# Altium PCB POETIC_Backplane_V2.PcbDoc (part 1 of 2)
Units mm, origin at the board's own origin, x right, y up, seen from the top; angles counter-clockwise.
Board outline 400 x 128 mm, 4 copper layers (Top Layer, Signal Layer 1, Internal Plane 1, Bottom Layer), stack 1.49 mm thick; 36 components, 76 nets, 998 pads, 2 vias.
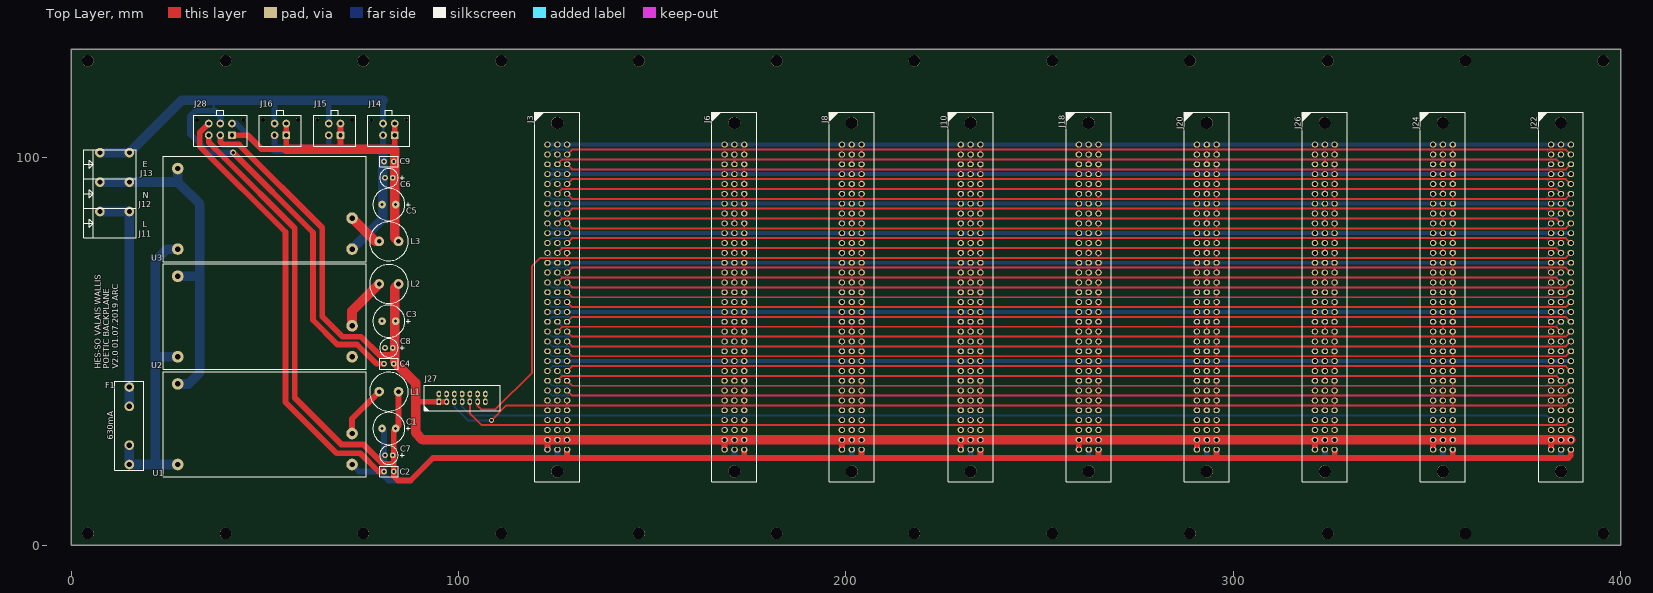
[diagram p0: Top Layer view]
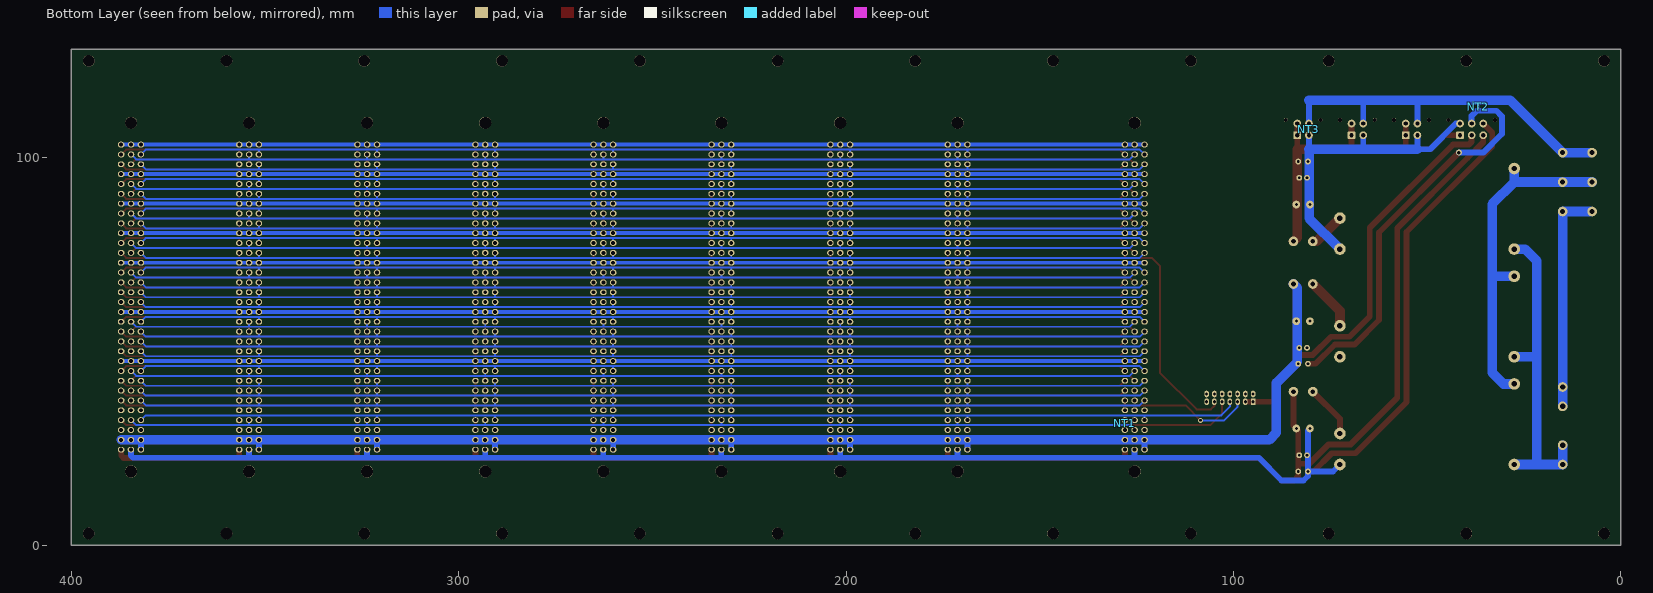
[diagram p1: Bottom Layer view, seen from below]
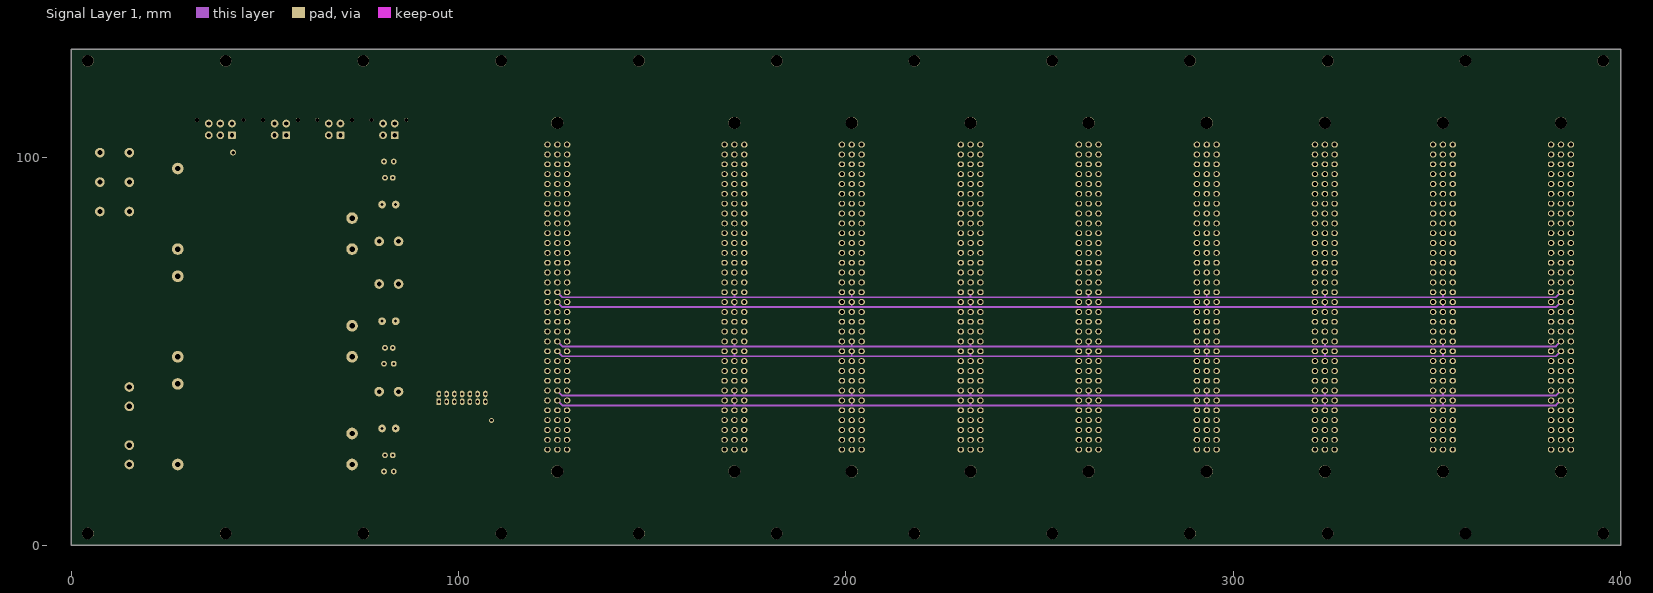
[diagram p2: Signal Layer 1]
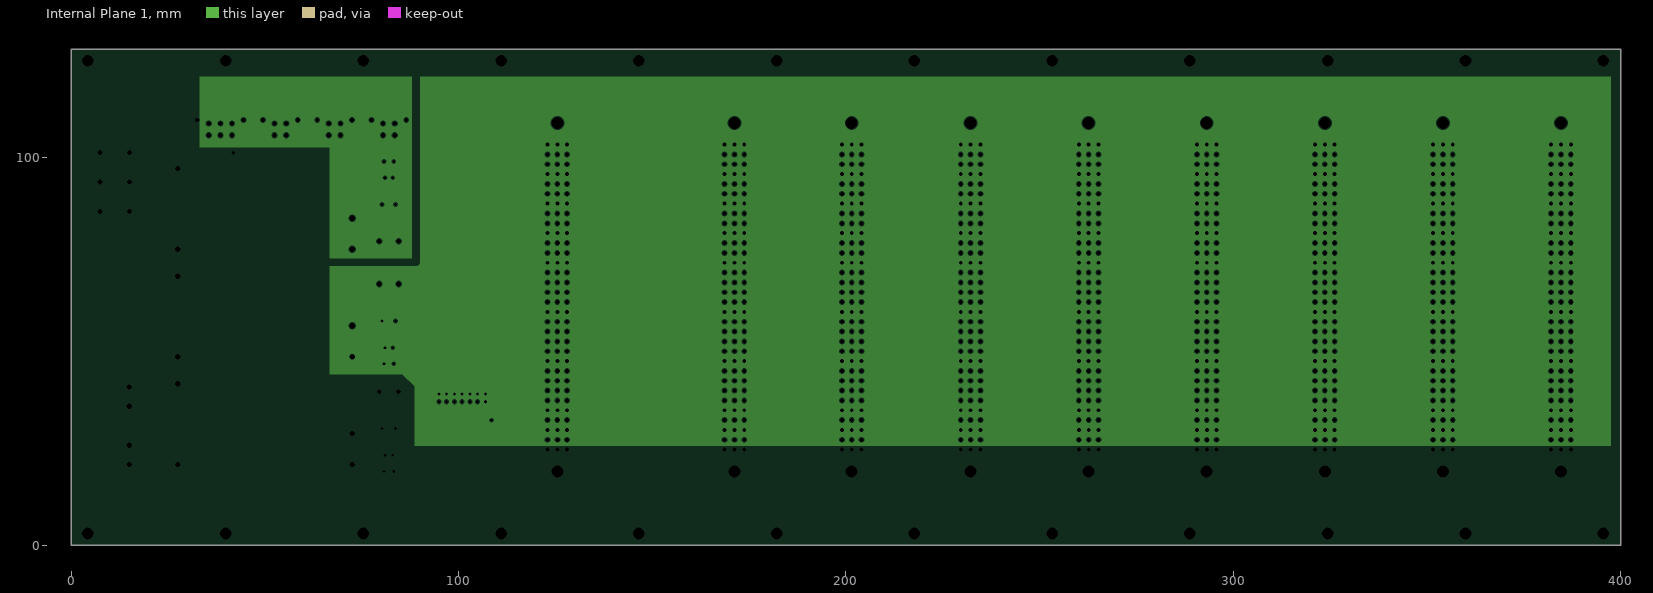
[diagram p3: Internal Plane 1, clearances drawn from the general rule]

## Layer stack, top to bottom
Top Layer: signal copper 0.035
Dielectric 1: core 0.45, FR-4, Dk 4.2
Signal Layer 1: signal copper 0.035
Dielectric 3: prepreg 0.45, FR-4, Dk 4.2
Internal Plane 1: plane copper 0.035, net (Multiple Nets)
Dielectric 2: core 0.45, FR-4, Dk 4.2
Bottom Layer: signal copper 0.035

## Board outline
0,0 400,0 400,128 0,128

## Design rules (kind name [scope] priority, off if disabled: settings)
AcuteAngle [All] p1: minimum=9.00000000000000E+0001 checktracksonly=TRUE
AssemblyTestPointUsage [All] p1 off:
AssemblyTestpoint [All] p1 off: testpointundercomponent=TRUE minsize=1.016 maxsize=2.54 preferedsize=1.524 minholesize=0 maxholesize=1.016 preferedholesize=0.813 testpointgrid=0.025 usegrid=TRUE gridtolerance=0 allowsidetop=TRUE allowsidebottom=TRUE
BoardOutlineClearance [All] p1 off: gap=0.25 ignorepadtopadclearanceinfootprint=FALSE
Clearance [All] p1: gap=0.25 ignorepadtopadclearanceinfootprint=FALSE except(0: Arc-Hole Track-Hole SMDPad-Hole THPad-Hole Via-Hole Fill-Hole Poly-Hole Region-Hole Text-Hole)
ComponentClearance [All] p1 off: gap=0.25 collisioncheckmode=3 verticalgap=0.25 showdistances=FALSE
DiffPairsRouting [All] p1 off: maxlimit=0.254 minlimit=0.254 mostfreqgap=0.254 toplayer_minwidth=0.381 toplayer_maxwidth=0.381 toplayer_prefwidth=0.381 midlayer1_minwidth=0.381 midlayer1_maxwidth=0.381 midlayer1_prefwidth=0.381 bottomlayer_minwidth=0.381 bottomlayer_maxwidth=0.381 bottomlayer_prefwidth=0.381 maxuncoupledlength=12.7
FabricationTestPointUsage [All] p1 off: valid=0 allowmultiple=FALSE
FabricationTestpoint [All] p1 off: side=3 testpointundercomponent=TRUE minsize=1.016 maxsize=2.54 preferedsize=1.524 minholesize=0 maxholesize=1.016 preferedholesize=0.813 testpointgrid=0.025 allowsidetop=TRUE allowsidebottom=TRUE usegrid=TRUE gridtolerance=0
FanoutControl Fanout_BGA [IsBGA] p1 off: bgadir=Out bgaviamode=Centered fanoutstyle=Auto fanoutdirection=Alternating viagrid=0.025 // Fanout_BGA (Default Rule)
FanoutControl Fanout_LCC [IsLCC] p2 off: bgadir=Out bgaviamode=Centered fanoutstyle=Auto fanoutdirection=Alternating viagrid=0.025 // Fanout_LCC (Default Rule)
FanoutControl Fanout_SOIC [IsSOIC] p3 off: bgadir=Out bgaviamode=Centered fanoutstyle=Auto fanoutdirection=Alternating viagrid=0.025 // Fanout_SOIC (Default Rule)
FanoutControl Fanout_Small [(CompPinCount < 5)] p4 off: bgadir=Out bgaviamode=Centered fanoutstyle=Auto fanoutdirection=OutThenIn viagrid=0.025 // Fanout_Small (Default Rule)
FanoutControl Fanout_Default [All] p5 off: bgadir=Out bgaviamode=Centered fanoutstyle=Auto fanoutdirection=Alternating viagrid=0.025 // Fanout_Default (Default Rule)
Height [All] p1 off: minheight=0 maxheight=25.4 prefheight=12.7
HoleSize [All] p1 off: absolutevalues=TRUE maxlimit=3 minlimit=0.15 maxpercent=80.000 minpercent=20.000
HoleToHoleClearance [All] p1 off: gap=0.25 allowstackedmicrovias=TRUE
LayerPairs [All] p1 off: enforce=TRUE
MinimumAnnularRing [All] p1 off: minimumring=0.35
MinimumSolderMaskSliver [All] p1 off: minsoldermaskwidth=0
PasteMaskExpansion [All] p1 off: expansion=0
PlaneClearance [All] p1: clearance=0.25
PlaneConnect [All] p1: planeconnectstyle=Relief reliefexpansion=0.5 reliefentries=4 reliefconductorwidth=0.5 reliefairgap=0.5
PolygonConnect [All] p1 off: connectstyle=Relief reliefconductorwidth=0.25 reliefentries=4 polygonreliefangle="90 Angle" airgapwidth=0.25
RoutingCorners [All] p1 off: cornerstyle=45-Degree minsetback=2.5 maxsetback=2.5
RoutingLayers [All] p1 off: top layer_v5=TRUE mid layer 1_v5=TRUE bottom layer_v5=TRUE
RoutingPriority [All] p1 off: routingpriority=0
RoutingTopology [All] p1 off: topology=Shortest
RoutingVias [All] p1: holewidth=0.9 width=1.5 viastyle="Through Hole" minholewidth=0.9 minwidth=1.5 maxholewidth=0.9 maxwidth=1.5
SilkToBoardRegionClearance [All] p1 off:
SilkToSilkClearance [All] p1 off: silktosilkclearance=0
SilkToSolderMaskClearance [IsPad] p1 off: minsilkscreentomaskgap=0 clearancetoexposedcopper=TRUE
SolderMaskExpansion [All] p1 off: expansion=0
Width [All] p1: maxlimit=10 minlimit=0.2 preferedwidth=1
4 further rules are at their usual default settings.

## Classes and differential pairs
component class Connector_1: J3 J6 J8 J10 J18
component class Supply: C1 C2 C3 C4 C5 C6 C7 C8 C9 F1 J11 J12 J13 J14 J15 J16 J28 L1 L2 L3 NT2 NT3 U1 U2 U3
component class Connector_3: J20 J22 J24 J26 J27 NT1

## Components (designator, comment, footprint, x,y, rotation, side; value= is the part's Value field where it differs from the comment)
C1 "100u / 50V" "Capacitor POL P3.5 D8.0 H13.0" 82,30.1 r180 top
C2 "100n / 35v" "Capacitor P2.5 C4.5x2.5 H4.0" 82,19 r0 top value="100n / 35V"
C3 "100u / 50V" "Capacitor POL P3.5 D8.0 H13.0" 82,57.8 r180 top
C4 "100n / 35v" "Capacitor P2.5 C4.5x2.5 H4.0" 82,46.8 r0 top value="100n / 35V"
C5 "100u / 50V" "Capacitor POL P3.5 D8.0 H13.0" 82,87.9 r180 top
C6 "100n / 35v" "Capacitor P2.5 C4.5x2.5 H4.0" 82,99 r0 top value="100n / 35V"
C7 "22u / 50V" "Capacitor POL P2.00 D5.5 H12.0" 82,23.2 r180 top
C8 "22u / 50V" "Capacitor POL P2.00 D5.5 H12.0" 82,50.9 r180 top
C9 "22u / 50V" "Capacitor POL P2.00 D5.5 H12.0" 82,94.8 r180 top
F1 "1A" "Fuse Cartridge 5x20 Shurter" 15,30.8 r270 top
J3 "09032967824" "DIN41612 FEM 3x32 ABC Straight" 125.48,64 r90 top
J6 "09032967824" "DIN41612 FEM 3x32 ABC Straight" 171.2,64 r90 top
J8 "09032967824" "DIN41612 FEM 3x32 ABC Straight" 201.48,64 r90 top
J10 "09032967824" "DIN41612 FEM 3x32 ABC Straight" 232.16,64 r90 top
J11 "1790351" "PC FFKDSA/H1-7,62 - 1790351" 10,83.1 r270 top
J12 "1790351" "PC FFKDSA/H1-7,62 - 1790351" 10,90.7 r270 top
J13 "1790351" "PC FFKDSA/H1-7,62 - 1790351" 10,98.3 r270 top
J14 "43045-0412" "MOLEX 43045-0412" 82,107.3 r0 top
J15 "43045-0412" "MOLEX 43045-0412" 68,107.3 r0 top
J16 "43045-0412" "MOLEX 43045-0412" 54,107.3 r0 top
J18 "09032967824" "DIN41612 FEM 3x32 ABC Straight" 262.64,64 r90 top
J20 "09032967824" "DIN41612 FEM 3x32 ABC Straight" 293.12,64 r90 top
J22 "09032967824" "DIN41612 FEM 3x32 ABC Straight" 384.56,64 r90 top
J24 "09032967824" "DIN41612 FEM 3x32 ABC Straight" 354.08,64 r90 top
J26 "09032967824" "DIN41612 FEM 3x32 ABC Straight" 323.6,64 r90 top
J27 "98414-G06-14ULF" "FlatCable2x7 2MM Straight TH FCI 98414-G06-14ULF" 100.9,38 r0 top
J28 "43045-0612" "MOLEX 43045-0612" 38.5,107.3 r0 top
L1 "2u2, 6A, R=10m" "L P5.0 D10.0 H13.0" 82,39.6 r0 top value="2u2, 6A, R=10m"
L2 "2u2, 6A, R=10m" "L P5.0 D10.0 H13.0" 82,67.4 r0 top value="2u2, 6A, R=10m"
L3 "2u2, 6A, R=10m" "L P5.0 D10.0 H13.0" 82,78.4 r0 top value="2u2, 6A, R=10m"
NT1 "Net Tie" "NET TIE 1005" 128.02,31.4 r90 bottom net-tie
NT2 "Net Tie" "NET TIE 1005" 36.8,113.2 r90 bottom net-tie
NT3 "Net Tie" "NET TIE 1005" 80.5,107.3 r90 bottom net-tie
U1 "IRM20-24" "MEAN WELL IRM-20 Series" 50,31.2 r0 top
U2 "IRM20-3.3" "MEAN WELL IRM-20 Series" 50,59 r0 top
U3 "IRM20-5" "MEAN WELL IRM-20 Series" 50,86.8 r0 top

## Footprints (in the part's own frame and the unit in brackets; to place one, negate y for a bottom-side part, rotate by r counter-clockwise, add the part's x,y. Pads: shape width x height; smd on the part's side, far side on the other; paste and mask are expansions set on the pad)
"Capacitor P2.5 C4.5x2.5 H4.0" [mm] "Capacitor Ceramic"
  round 1.5 hole 0.7: 1(-1.25,0) 2(1.25,0)
  silkscreen extent -2.4,-1.4 2.4,1.4, body extent -2.25,-1.25 2.25,1.25, height 4
"Capacitor POL P2.00 D5.5 H12.0" [mm] "Capacitor Electrolyte Polarized Pitch 2mm, Diameter 5.5mm, Height 12mm"
  round 1.5 hole 0.7: 1(-1,0) 2(1,0)
  silkscreen extent -4,-2.4 2.4,2.4, body extent -2.28,-2.25 2.29,2.25, height 12.05
"Capacitor POL P3.5 D8.0 H13.0" [mm] "Capacitor Electrolyte Polarized Pitch 3.5mm, Diameter 8mm, Height 13mm"
  round 2 hole 0.8: 1(-1.75,0) 2(1.75,0)
  silkscreen extent -5.5,-4.15 4.15,4.15, body extent -4,-4 4.05,4, height 13.05
"DIN41612 FEM 3x32 ABC Straight" [mm] "DIN41612 FEM 3x32 ABC Straight Harting 09 03 296 6824"
  round 3.1 hole 3.1 unplated paste-25.4 mask-25.4: 0(-45,0) 0(45,0)
  oval 1.5x1.7 hole 1: A1(39.37,2.54) A2(36.83,2.54) A3(34.29,2.54) A4(31.75,2.54) A5(29.21,2.54) A6(26.67,2.54) A7(24.13,2.54) A8(21.59,2.54) A9(19.05,2.54) A10(16.51,2.54) A11(13.97,2.54) A12(11.43,2.54) A13(8.89,2.54) A14(6.35,2.54) A15(3.81,2.54) A16(1.27,2.54) A17(-1.27,2.54) A18(-3.81,2.54) A19(-6.35,2.54) A20(-8.89,2.54) A21(-11.43,2.54) A22(-13.97,2.54) A23(-16.51,2.54) A24(-19.05,2.54) A25(-21.59,2.54) A26(-24.13,2.54) A27(-26.67,2.54) A28(-29.21,2.54) A29(-31.75,2.54) A30(-34.29,2.54) A31(-36.83,2.54) A32(-39.37,2.54) B1(39.37,0) B2(36.83,0) B3(34.29,0) B4(31.75,0) B5(29.21,0) B6(26.67,0) B7(24.13,0) B8(21.59,0) B9(19.05,0) B10(16.51,0) B11(13.97,0) B12(11.43,0) B13(8.89,0) B14(6.35,0) B15(3.81,0) B16(1.27,0) B17(-1.27,0) B18(-3.81,0) B19(-6.35,0) B20(-8.89,0) B21(-11.43,0) B22(-13.97,0) B23(-16.51,0) B24(-19.05,0) B25(-21.59,0) B26(-24.13,0) B27(-26.67,0) B28(-29.21,0) B29(-31.75,0) B30(-34.29,-0.02) B31(-36.83,-0.02) B32(-39.37,-0.02) C1(39.37,-2.54) C2(36.83,-2.54) C3(34.29,-2.54) C4(31.75,-2.54) C5(29.21,-2.54) C6(26.67,-2.54) C7(24.13,-2.54) C8(21.59,-2.54) C9(19.05,-2.54) C10(16.51,-2.54) C11(13.97,-2.54) C12(11.43,-2.54) C13(8.89,-2.54) C14(6.35,-2.54) C15(3.81,-2.54) C16(1.27,-2.54) C17(-1.27,-2.54) C18(-3.81,-2.54) C19(-6.35,-2.54) C20(-8.89,-2.54) C21(-11.43,-2.54) C22(-13.97,-2.54) C23(-16.51,-2.54) C24(-19.05,-2.54) C25(-21.59,-2.54) C26(-24.13,-2.54) C27(-26.67,-2.54) C28(-29.21,-2.54) C29(-31.75,-2.54) C30(-34.29,-2.54) C31(-36.83,-2.54) C32(-39.37,-2.54)
  silkscreen extent -47.7,-5.8 47.7,5.8, body extent -47.5,-5.6 47.5,5.6, height 11.6
"FlatCable2x7 2MM Straight TH FCI 98414-G06-14ULF" [mm] "FlatCable2x7 2MM Straight TH FCI 98414-G06-14ULF"
  rrect25% 1.2x1.7 hole 0.8: 1(-6,-1)
  oval 1.2x1.7 hole 0.8: 2(-6,1) 3(-4,-1) 4(-4,1) 5(-2,-1) 6(-2,1) 7(0,-1) 8(0,1) 9(2,-1) 10(2,1) 11(4,-1) 12(4,1) 13(6,-1) 14(6,1)
  silkscreen extent -9.8,-3.3 9.8,3.3, body extent -8,-3 8,3, height 5.9
"Fuse Cartridge 5x20 Shurter" [mm] "Fuse Cartridge 5x20 Shurter"
  round 2.5 hole 1.4: 1(-10,0) 1(-5,0) 2(5,0) 2(10,0)
  silkscreen extent -11.5,-3.7 11.5,3.7, body extent -11,-3.5 11,3.5, height 9
"L P5.0 D10.0 H13.0" [mm] "Inductor P5.0 D10.0 H13.0"
  round 2.5 hole 1.2: 1(-2.5,0) 2(2.5,0)
  silkscreen extent -5,-5 5,5, body extent -5,-5 5,5, height 13
"MEAN WELL IRM-20 Series" [mm] "AC-DC Mean Well C27.2x52.4 H24"
  round 3 hole 1.4: 1(-22.5,-10.4) 2(-22.5,10.4) 3(22.5,-2.4) 4(22.5,-10.4)
  silkscreen extent -26.2,-13.6 26.2,13.6, body extent -26.2,-13.6 26.2,13.6, height 24
"MOLEX 43045-0412" [mm] "Micro-Fit 3.0 Vertical Header, 3.00mm Pitch, Dual Row, 4 Circuits"
  round 1 hole 1 paste-25.4 mask-25.4: 0(-4.5,2.45) 0(4.5,2.45)
  rrect25% 2x2 hole 1.1: 1(1.5,-1.5)
  round 2 hole 1.1: 2(-1.5,-1.5) 3(1.5,1.5) 4(-1.5,1.5)
  silkscreen extent -5.4,-4.3 5.4,5, body extent -5.1,-4 5.1,4.8, height 10
"MOLEX 43045-0612" [mm] "Micro-Fit 3.0 Vertical Header, 3.00mm Pitch, Dual Row, 6 Circuits"
  round 1 hole 1 paste-25.4 mask-25.4: 0(-6,2.45) 0(6,2.45)
  rrect25% 2x2.032 hole 1.1: 1(3,-1.5)
  round 2 hole 1.1: 2(0,-1.5) 3(-3,-1.5) 4(3,1.5) 5(0,1.5) 6(-3,1.5)
  silkscreen extent -6.9,-4.3 6.9,5, body extent -6.6,-4 6.6,4.8, height 10
"NET TIE 1005" [mm] "Net Tie, connect two different net without DRC error"
  rrect25% 0.4x0.5 smd paste-0.8 mask+1: 1(-0.3,0)
  rrect25% 0.4x0.5 smd paste-0.8 mask+0: 2(0.3,0)
  Top Layer region: -0.3,0.25 -0.3,-0.25 0.325,-0.25 0.325,0.25
"PC FFKDSA/H1-7,62 - 1790351" [mm] "Phoenix Contact PCB terminal block - FFKDSA/H1-7,62 - 1790351"
  round 2.5 hole 1.3: 1(-3,-2.6) 2(-3,5)
  silkscreen extent -3.8,-6.8 3.8,6.8, body extent -3.8,-6.8 3.8,6.8, height 21.5

## Part data
C1 C3 C5 C7 C8 C9: library part "Capacitor Polarized", "Capacitor polarized", Manufacturer=Panasonic
  C1 C3 C5: Mouser No.=667-EEU-FR1H101
  C7 C8 C9: Mouser No.=667-EEU-FR1H220
C2 C4 C6: library part Capacitor, "Capacitor"
F1: library part "Fuse Cartridge 5x20", "Fuse Cartridge 5x20"
J3 J6 J8 J10 J18 J20 J22 J24 J26: library part "DIN41612 FEM 3X32 STRAIGHT", "DIN41612 FEM 3X32 ABC STRAIGHT", Manufacturer=Harting, Mouser No.=617-09032967824
J11 J12 J13: library part "PC FFKDSA/H1-7,62 - 1790351", "Phoenix Contact PCB terminal block - FFKDSA/H1-7,62 - 1790351"
J14 J15 J16: library part "MOLEX 43045-0412", "Micro-Fit 3.0 Vertical Header, 3.00mm Pitch, Dual Row, 4 Circuits", Manufacturer=Molex, Mouser No.=538-43045-0412
J27: library part FlatCable2x7, "FlatCable2x7", Manufacturer="Amphenol FCI", Mouser No.=649-98414-G06-14ULF
J28: library part "MOLEX 43045-0612", "Micro-Fit 3.0 Vertical Header, 3.00mm Pitch, Dual Row, 6 Circuits", Manufacturer=Molex, Mouser No.=538-43045-0612
L1 L2 L3: library part Inductor, "Inductor", Manufacturer=Fastron, Mouser No.=434-07HCP-2R2M
NT1 NT2 NT3: "Connection for 2 different NETNAME"
U1 U2 U3: library part "MEAN WELL IRM-20 series", "AC-DC 20W Single Output Encapsulated Type Converter"

## Free pads (board coordinates)
  round 3 hole 3: 0(4.3,3) 0(4.3,125) 0(39.86,3) 0(39.86,125) 0(75.42,3) 0(75.42,125) 0(110.98,3) 0(110.98,125) 0(146.54,3) 0(146.54,125) 0(182.1,3) 0(182.1,125) 0(217.66,3) 0(217.66,125) 0(253.22,3) 0(253.22,125) 0(288.78,3) 0(288.78,125) 0(324.34,3) 0(324.34,125) 0(359.9,3) 0(359.9,125) 0(395.46,3) 0(395.46,125)

## Via types
v1: diameter 1.27, hole 0.711, Top Layer to Bottom Layer, tented both sides, 1 vias
v2: diameter 1.5, hole 0.9, Top Layer to Bottom Layer, tented both sides, 1 vias

## Nets (pads, with @x,y where several pads share a name; then routed paths per layer and width w, separated by ;. In a path a pad name is that pad's centre, name@x,y a point inside that pad or via, vN(x,y) a via of type N, cw(c..) or ccw(c..) an arc to the next point about the centre after c; other vN are vias at no path point)
+3V3_BP: C3.1 C4.2 C8.1 J3.A31 J3.A32 J3.B31 J3.C31 J6.A31 J6.A32 J6.B31 J6.C31 J8.A31 J8.A32 J8.B31 J8.C31 J10.A31 J10.A32 J10.B31 J10.C31 J18.A31 J18.A32 J18.B31 J18.C31 J20.A31 J20.A32 J20.B31 J20.C31 J22.A31 J22.A32 J22.B31 J22.C31 J24.A31 J24.A32 J24.B31 J24.C31 J26.A31 J26.A32 J26.B31 J26.C31 J27.1 J27.3 J28.2 L2.2 | length 816.7
  Top Layer w1.5: J28.2@38.5,105.8 38.5,104.1 39.23,103.37 43.33,103.37 64.8,81.9 64.8,59 70,53.8 74.8,53.8 79.5,49.1 83,49.1 83.5,48.6 ; 88.9,37 J27.1@94.9,37 J27.3@96.9,37 ; J3.A32@122.94,24.63 J3.A31@122.94,27.17 ; J6.A32@168.66,24.63 J6.A31@168.66,27.17 ; J8.A32@198.94,24.63 J8.A31@198.94,27.17 ; J10.A32@229.62,24.63 J10.A31@229.62,27.17 ; J18.A32@260.1,24.63 J18.A31@260.1,27.17 ; J20.A32@290.58,24.63 J20.A31@290.58,27.17 ; J26.A32@321.06,24.63 J26.A31@321.06,27.17 ; J24.A32@351.54,24.63 J24.A31@351.54,27.17 ; J22.A32@382.02,24.63 J22.A31@382.02,27.17
  Top Layer w2.5: L2.2@84.5,67.4 83.5,66.4 83.5,48.6 83.5,47.3 88.9,41.9 88.9,37 88.9,29 90.73,27.17 97.46,27.17 ; 97.54,27.17 J3.A31@122.94,27.17 J3.C31@128.02,27.17 J6.A31@168.66,27.17 J6.C31@173.74,27.17 J8.A31@198.94,27.17 J8.C31@204.02,27.17 J10.A31@229.62,27.17 J10.C31@234.7,27.17 J18.A31@260.1,27.17 J18.C31@265.18,27.17 J20.A31@290.58,27.17 J20.C31@295.66,27.17 J26.A31@321.06,27.17 J26.C31@326.14,27.17 J24.A31@351.54,27.17 J24.C31@356.62,27.17 J22.A31@382.02,27.17 J22.C31@387.1,27.17
  Bottom Layer w1.5: J3.A32@122.94,24.63 J3.A31@122.94,27.17 ; J6.A32@168.66,24.63 J6.A31@168.66,27.17 ; J8.A32@198.94,24.63 J8.A31@198.94,27.17 ; J10.A32@229.62,24.63 J10.A31@229.62,27.17 ; J18.A32@260.1,24.63 J18.A31@260.1,27.17 ; J20.A32@290.58,24.63 J20.A31@290.58,27.17 ; J26.A32@321.06,24.63 J26.A31@321.06,27.17 ; J24.A32@351.54,24.63 J24.A31@351.54,27.17 ; J22.A32@382.02,24.63 J22.A31@382.02,27.17
  Bottom Layer w2.5: L2.2@84.5,67.4 83.5,66.4 83.5,47.3 88.9,41.9 88.9,29 90.73,27.17 97.46,27.17 ; 97.54,27.17 107.7,27.17 J3.A31@122.94,27.17 J3.C31@128.02,27.17 153.42,27.17 J6.A31@168.66,27.17 J6.C31@173.74,27.17 J8.A31@198.94,27.17 J8.C31@204.02,27.17 J10.A31@229.62,27.17 J10.C31@234.7,27.17 J18.A31@260.1,27.17 J18.C31@265.18,27.17 J20.A31@290.58,27.17 J20.C31@295.66,27.17 305.82,27.17 J26.A31@321.06,27.17 J26.C31@326.14,27.17 J24.A31@351.54,27.17 J24.C31@356.62,27.17 J22.A31@382.02,27.17 J22.C31@387.1,27.17
+5V_MEAS: C5.1 C6.2 C9.1 J14.1 J14.3 J15.1 J15.3 J16.1 J16.3 J28.1 L3.2 | length 87.4
  Top Layer w1.5: J28.1@41.5,105.8 45.6,105.8 49.2,102.2 55.5,102.2 J16.1@55.5,105.8 J16.3@55.5,108.8 ; 69.5,102.2 J15.3@69.5,108.8 ; 83.5,102.2 J14.3@83.5,108.8
  Top Layer w2.5: 55.5,102.2 69.5,102.2 83.5,102.2 C6.2@83.5,99 ; C6.2@83.5,98.9 83.5,79.4 L3.2@84.5,78.4
+24V_BP: C1.1 C2.2 C7.1 J3.C32 J6.C32 J8.C32 J10.C32 J18.C32 J20.C32 J22.C32 J24.C32 J26.C32 J28.3 L1.2 | length 457.4
  Top Layer w1.5: J28.3@35.5,105.8 35.5,104 39.6,99.9 57.7,81.8 57.7,38 69.7,26 75.4,26 80.4,21 83.25,21 ; L1.2@84.5,39.6 84.5,30.85 C1.1@83.75,30.1 83.25,29.6 83.25,21 ; J3.C32@128.02,24.63 128.02,22.5 ; J6.C32@173.74,24.63 173.74,22.5 ; J8.C32@204.02,24.63 204.02,22.5 ; J10.C32@234.7,24.63 234.7,22.5 ; J18.C32@265.18,24.63 265.18,22.5 ; J20.C32@295.66,24.63 295.66,22.5 ; J26.C32@326.14,24.63 326.14,22.5 ; J24.C32@356.62,24.63 356.62,22.5 ; J22.C32@387.1,24.63 387.1,23.1 386.5,22.5 356.62,22.5 ; 83.25,21 C2.2@83.25,19 83.25,17.8 84.35,16.7 87.6,16.7 93.4,22.5 128.02,22.5 ; 128.02,22.5 173.74,22.5 ; 173.74,22.5 204.02,22.5 ; 204.02,22.5 234.7,22.5 ; 234.7,22.5 265.18,22.5 ; 265.18,22.5 295.66,22.5 ; 295.66,22.5 326.14,22.5 ; 326.14,22.5 356.62,22.5
BN_EN: J3.A29 J6.A29 J8.A29 J10.A29 J18.A29 J20.A29 J22.A29 J24.A29 J26.A29 J27.7 | length 293.8
  Bottom Layer w0.5: J27.7@100.9,37 100.9,35.7 103.1,33.5 122.94,33.5 ; J3.A29@122.94,32.25 122.94,33.5 ; J6.A29@168.66,32.25 168.66,33.5 ; J8.A29@198.94,32.25 198.94,33.5 ; J10.A29@229.62,32.25 229.62,33.5 ; J18.A29@260.1,32.25 260.1,33.5 ; J20.A29@290.58,32.25 290.58,33.5 ; J26.A29@321.06,32.25 321.06,33.5 ; J24.A29@351.54,32.25 351.54,33.5 ; J22.A29@382.02,32.25 380.77,33.5 351.54,33.5 ; 122.94,33.5 168.66,33.5 ; 168.66,33.5 198.94,33.5 ; 198.94,33.5 229.62,33.5 ; 229.62,33.5 260.1,33.5 ; 260.1,33.5 290.58,33.5 ; 290.58,33.5 321.06,33.5 ; 321.06,33.5 351.54,33.5
BN_ERROR_R: J3.C29 J6.C29 J8.C29 J10.C29 J18.C29 J20.C29 J22.C29 J24.C29 J26.C29 J27.9 NT1.2 | length 299.3
  Top Layer w0.5: J27.9@102.9,37 102.9,34 105.94,30.96 128.02,30.96 ; J3.C29@128.02,32.25 128.02,30.96 ; J6.C29@173.74,32.25 173.74,30.96 ; J8.C29@204.02,32.25 204.02,30.96 ; J10.C29@234.7,32.25 234.7,30.96 ; J18.C29@265.18,32.25 265.18,30.96 ; J20.C29@295.66,32.25 295.66,30.96 ; J26.C29@326.14,32.25 326.14,30.96 ; J24.C29@356.62,32.25 356.62,30.96 ; J22.C29@387.1,32.25 385.81,30.96 356.62,30.96 ; 128.02,30.96 173.74,30.96 ; 173.74,30.96 204.02,30.96 ; 204.02,30.96 234.7,30.96 ; 234.7,30.96 265.18,30.96 ; 265.18,30.96 295.66,30.96 ; 295.66,30.96 326.14,30.96 ; 326.14,30.96 356.62,30.96
BN_ERROR_W: J3.B29 J6.B29 J8.B29 J10.B29 J18.B29 J20.B29 J22.B29 J24.B29 J26.B29 NT1.1 | length 269.2
  Bottom Layer w0.5: J3.B29@125.48,32.25 126.77,30.96 128.02,30.96 171.2,30.96 ; J6.B29@171.2,32.25 171.2,30.96 ; J8.B29@201.48,32.25 201.48,30.96 ; J10.B29@232.16,32.25 232.16,30.96 ; J18.B29@262.64,32.25 262.64,30.96 ; J20.B29@293.12,32.25 293.12,30.96 ; J26.B29@323.6,32.25 323.6,30.96 ; J24.B29@354.08,32.25 354.08,30.96 ; J22.B29@384.56,32.25 383.27,30.96 354.08,30.96 ; 171.2,30.96 201.48,30.96 ; 201.48,30.96 232.16,30.96 ; 232.16,30.96 262.64,30.96 ; 262.64,30.96 293.12,30.96 ; 293.12,30.96 323.6,30.96 ; 323.6,30.96 354.08,30.96
BN_MASTER_RST: J3.C27 J6.C27 J8.C27 J10.C27 J18.C27 J20.C27 J22.C27 J24.C27 J26.C27 J27.5 | length 303.4
  Top Layer w0.5: v1(108.5,32.2) 112.34,36.04 128.02,36.04 ; J3.C27@128.02,37.33 128.02,36.04 ; J6.C27@173.74,37.33 173.74,36.04 ; J8.C27@204.02,37.33 204.02,36.04 ; J10.C27@234.7,37.33 234.7,36.04 ; J18.C27@265.18,37.33 265.18,36.04 ; J20.C27@295.66,37.33 295.66,36.04 ; J26.C27@326.14,37.33 326.14,36.04 ; J24.C27@356.62,37.33 356.62,36.04 ; J22.C27@387.1,37.33 385.81,36.04 356.62,36.04 ; 128.02,36.04 173.74,36.04 ; 173.74,36.04 204.02,36.04 ; 204.02,36.04 234.7,36.04 ; 234.7,36.04 265.18,36.04 ; 265.18,36.04 295.66,36.04 ; 295.66,36.04 326.14,36.04 ; 326.14,36.04 356.62,36.04
  Bottom Layer w0.5: J27.5@98.9,37 98.9,35.7 102.4,32.2 v1(108.5,32.2)
BP_GPIO_0: J3.A14 J6.A14 J8.A14 J10.A14 J18.A14 J20.A14 J22.A14 J24.A14 J26.A14 | length 268.9
  Bottom Layer w0.5: J3.A14@122.94,70.35 124.19,71.6 168.66,71.6 ; J6.A14@168.66,70.35 168.66,71.6 ; J8.A14@198.94,70.35 198.94,71.6 ; J10.A14@229.62,70.35 229.62,71.6 ; J18.A14@260.1,70.35 260.1,71.6 ; J20.A14@290.58,70.35 290.58,71.6 ; J26.A14@321.06,70.35 321.06,71.6 ; J24.A14@351.54,70.35 351.54,71.6 ; J22.A14@382.02,70.35 380.77,71.6 351.54,71.6 ; 168.66,71.6 198.94,71.6 ; 198.94,71.6 229.62,71.6 ; 229.62,71.6 260.1,71.6 ; 260.1,71.6 290.58,71.6 ; 290.58,71.6 321.06,71.6 ; 321.06,71.6 351.54,71.6
BP_GPIO_1: J3.A15 J6.A15 J8.A15 J10.A15 J18.A15 J20.A15 J22.A15 J24.A15 J26.A15 | length 269.2
  Bottom Layer w0.5: J3.A15@122.94,67.81 124.23,66.52 168.66,66.52 ; J6.A15@168.66,67.81 168.66,66.52 ; J8.A15@198.94,67.81 198.94,66.52 ; J10.A15@229.62,67.81 229.62,66.52 ; J18.A15@260.1,67.81 260.1,66.52 ; J20.A15@290.58,67.81 290.58,66.52 ; J26.A15@321.06,67.81 321.06,66.52 ; J24.A15@351.54,67.81 351.54,66.52 ; J22.A15@382.02,67.81 380.73,66.52 351.54,66.52 ; 168.66,66.52 198.94,66.52 ; 198.94,66.52 229.62,66.52 ; 229.62,66.52 260.1,66.52 ; 260.1,66.52 290.58,66.52 ; 290.58,66.52 321.06,66.52 ; 321.06,66.52 351.54,66.52
BP_GPIO_2: J3.A16 J6.A16 J8.A16 J10.A16 J18.A16 J20.A16 J22.A16 J24.A16 J26.A16 | length 269.2
  Bottom Layer w0.5: J3.A16@122.94,65.27 124.23,63.98 168.66,63.98 ; J6.A16@168.66,65.27 168.66,63.98 ; J8.A16@198.94,65.27 198.94,63.98 ; J10.A16@229.62,65.27 229.62,63.98 ; J18.A16@260.1,65.27 260.1,63.98 ; J20.A16@290.58,65.27 290.58,63.98 ; J26.A16@321.06,65.27 321.06,63.98 ; J24.A16@351.54,65.27 351.54,63.98 ; J22.A16@382.02,65.27 380.73,63.98 351.54,63.98 ; 168.66,63.98 198.94,63.98 ; 198.94,63.98 229.62,63.98 ; 229.62,63.98 260.1,63.98 ; 260.1,63.98 290.58,63.98 ; 290.58,63.98 321.06,63.98 ; 321.06,63.98 351.54,63.98
BP_GPIO_3: J3.A17 J6.A17 J8.A17 J10.A17 J18.A17 J20.A17 J22.A17 J24.A17 J26.A17 | length 269.2
  Bottom Layer w0.5: J3.A17@122.94,62.73 124.23,61.44 168.66,61.44 ; J6.A17@168.66,62.73 168.66,61.44 ; J8.A17@198.94,62.73 198.94,61.44 ; J10.A17@229.62,62.73 229.62,61.44 ; J18.A17@260.1,62.73 260.1,61.44 ; J20.A17@290.58,62.73 290.58,61.44 ; J26.A17@321.06,62.73 321.06,61.44 ; J24.A17@351.54,62.73 351.54,61.44 ; J22.A17@382.02,62.73 380.73,61.44 351.54,61.44 ; 168.66,61.44 198.94,61.44 ; 198.94,61.44 229.62,61.44 ; 229.62,61.44 260.1,61.44 ; 260.1,61.44 290.58,61.44 ; 290.58,61.44 321.06,61.44 ; 321.06,61.44 351.54,61.44
BP_GPIO_4: J3.A19 J6.A19 J8.A19 J10.A19 J18.A19 J20.A19 J22.A19 J24.A19 J26.A19 | length 268.9
  Bottom Layer w0.5: J3.A19@122.94,57.65 124.19,58.9 168.66,58.9 ; J6.A19@168.66,57.65 168.66,58.9 ; J8.A19@198.94,57.65 198.94,58.9 ; J10.A19@229.62,57.65 229.62,58.9 ; J18.A19@260.1,57.65 260.1,58.9 ; J20.A19@290.58,57.65 290.58,58.9 ; J26.A19@321.06,57.65 321.06,58.9 ; J24.A19@351.54,57.65 351.54,58.9 ; J22.A19@382.02,57.65 380.77,58.9 351.54,58.9 ; 168.66,58.9 198.94,58.9 ; 198.94,58.9 229.62,58.9 ; 229.62,58.9 260.1,58.9 ; 260.1,58.9 290.58,58.9 ; 290.58,58.9 321.06,58.9 ; 321.06,58.9 351.54,58.9
BP_GPIO_5: J3.A20 J6.A20 J8.A20 J10.A20 J18.A20 J20.A20 J22.A20 J24.A20 J26.A20 | length 269.2
  Bottom Layer w0.5: J3.A20@122.94,55.11 124.23,53.82 168.66,53.82 ; J6.A20@168.66,55.11 168.66,53.82 ; J8.A20@198.94,55.11 198.94,53.82 ; J10.A20@229.62,55.11 229.62,53.82 ; J18.A20@260.1,55.11 260.1,53.82 ; J20.A20@290.58,55.11 290.58,53.82 ; J26.A20@321.06,55.11 321.06,53.82 ; J24.A20@351.54,55.11 351.54,53.82 ; J22.A20@382.02,55.11 380.73,53.82 351.54,53.82 ; 168.66,53.82 198.94,53.82 ; 198.94,53.82 229.62,53.82 ; 229.62,53.82 260.1,53.82 ; 260.1,53.82 290.58,53.82 ; 290.58,53.82 321.06,53.82 ; 321.06,53.82 351.54,53.82
BP_GPIO_6: J3.A21 J6.A21 J8.A21 J10.A21 J18.A21 J20.A21 J22.A21 J24.A21 J26.A21 | length 269.2
  Bottom Layer w0.5: J3.A21@122.94,52.57 124.23,51.28 168.66,51.28 ; J6.A21@168.66,52.57 168.66,51.28 ; J8.A21@198.94,52.57 198.94,51.28 ; J10.A21@229.62,52.57 229.62,51.28 ; J18.A21@260.1,52.57 260.1,51.28 ; J20.A21@290.58,52.57 290.58,51.28 ; J26.A21@321.06,52.57 321.06,51.28 ; J24.A21@351.54,52.57 351.54,51.28 ; J22.A21@382.02,52.57 380.73,51.28 351.54,51.28 ; 168.66,51.28 198.94,51.28 ; 198.94,51.28 229.62,51.28 ; 229.62,51.28 260.1,51.28 ; 260.1,51.28 290.58,51.28 ; 290.58,51.28 321.06,51.28 ; 321.06,51.28 351.54,51.28
BP_GPIO_7: J3.A22 J6.A22 J8.A22 J10.A22 J18.A22 J20.A22 J22.A22 J24.A22 J26.A22 | length 269.2
  Bottom Layer w0.5: J3.A22@122.94,50.03 124.23,48.74 168.66,48.74 ; J6.A22@168.66,50.03 168.66,48.74 ; J8.A22@198.94,50.03 198.94,48.74 ; J10.A22@229.62,50.03 229.62,48.74 ; J18.A22@260.1,50.03 260.1,48.74 ; J20.A22@290.58,50.03 290.58,48.74 ; J26.A22@321.06,50.03 321.06,48.74 ; J24.A22@351.54,50.03 351.54,48.74 ; J22.A22@382.02,50.03 380.73,48.74 351.54,48.74 ; 168.66,48.74 198.94,48.74 ; 198.94,48.74 229.62,48.74 ; 229.62,48.74 260.1,48.74 ; 260.1,48.74 290.58,48.74 ; 290.58,48.74 321.06,48.74 ; 321.06,48.74 351.54,48.74
BP_GPIO_8: J3.A24 J6.A24 J8.A24 J10.A24 J18.A24 J20.A24 J22.A24 J24.A24 J26.A24 | length 268.9
  Bottom Layer w0.5: J3.A24@122.94,44.95 124.19,46.2 168.66,46.2 ; J6.A24@168.66,44.95 168.66,46.2 ; J8.A24@198.94,44.95 198.94,46.2 ; J10.A24@229.62,44.95 229.62,46.2 ; J18.A24@260.1,44.95 260.1,46.2 ; J20.A24@290.58,44.95 290.58,46.2 ; J26.A24@321.06,44.95 321.06,46.2 ; J24.A24@351.54,44.95 351.54,46.2 ; J22.A24@382.02,44.95 380.77,46.2 351.54,46.2 ; 168.66,46.2 198.94,46.2 ; 198.94,46.2 229.62,46.2 ; 229.62,46.2 260.1,46.2 ; 260.1,46.2 290.58,46.2 ; 290.58,46.2 321.06,46.2 ; 321.06,46.2 351.54,46.2
BP_GPIO_9: J3.A25 J6.A25 J8.A25 J10.A25 J18.A25 J20.A25 J22.A25 J24.A25 J26.A25 | length 269.2
  Bottom Layer w0.5: J3.A25@122.94,42.41 124.23,41.12 168.66,41.12 ; J6.A25@168.66,42.41 168.66,41.12 ; J8.A25@198.94,42.41 198.94,41.12 ; J10.A25@229.62,42.41 229.62,41.12 ; J18.A25@260.1,42.41 260.1,41.12 ; J20.A25@290.58,42.41 290.58,41.12 ; J26.A25@321.06,42.41 321.06,41.12 ; J24.A25@351.54,42.41 351.54,41.12 ; J22.A25@382.02,42.41 380.73,41.12 351.54,41.12 ; 168.66,41.12 198.94,41.12 ; 198.94,41.12 229.62,41.12 ; 229.62,41.12 260.1,41.12 ; 260.1,41.12 290.58,41.12 ; 290.58,41.12 321.06,41.12 ; 321.06,41.12 351.54,41.12
BP_GPIO_10: J3.A26 J6.A26 J8.A26 J10.A26 J18.A26 J20.A26 J22.A26 J24.A26 J26.A26 | length 269.2
  Bottom Layer w0.5: J3.A26@122.94,39.87 124.23,38.58 168.66,38.58 ; J6.A26@168.66,39.87 168.66,38.58 ; J8.A26@198.94,39.87 198.94,38.58 ; J10.A26@229.62,39.87 229.62,38.58 ; J18.A26@260.1,39.87 260.1,38.58 ; J20.A26@290.58,39.87 290.58,38.58 ; J26.A26@321.06,39.87 321.06,38.58 ; J24.A26@351.54,39.87 351.54,38.58 ; J22.A26@382.02,39.87 380.73,38.58 351.54,38.58 ; 168.66,38.58 198.94,38.58 ; 198.94,38.58 229.62,38.58 ; 229.62,38.58 260.1,38.58 ; 260.1,38.58 290.58,38.58 ; 290.58,38.58 321.06,38.58 ; 321.06,38.58 351.54,38.58
BP_GPIO_11: J3.A27 J6.A27 J8.A27 J10.A27 J18.A27 J20.A27 J22.A27 J24.A27 J26.A27 | length 269.2
  Bottom Layer w0.5: J3.A27@122.94,37.33 124.23,36.04 168.66,36.04 ; J6.A27@168.66,37.33 168.66,36.04 ; J8.A27@198.94,37.33 198.94,36.04 ; J10.A27@229.62,37.33 229.62,36.04 ; J18.A27@260.1,37.33 260.1,36.04 ; J20.A27@290.58,37.33 290.58,36.04 ; J26.A27@321.06,37.33 321.06,36.04 ; J24.A27@351.54,37.33 351.54,36.04 ; J22.A27@382.02,37.33 380.73,36.04 351.54,36.04 ; 168.66,36.04 198.94,36.04 ; 198.94,36.04 229.62,36.04 ; 229.62,36.04 260.1,36.04 ; 260.1,36.04 290.58,36.04 ; 290.58,36.04 321.06,36.04 ; 321.06,36.04 351.54,36.04
BP_GPIO_13: J3.B14 J6.B14 J8.B14 J10.B14 J18.B14 J20.B14 J22.B14 J24.B14 J26.B14 | length 269.2
  Bottom Layer w0.5: J3.B14@125.48,70.35 126.77,69.06 171.2,69.06 ; J6.B14@171.2,70.35 171.2,69.06 ; J8.B14@201.48,70.35 201.48,69.06 ; J10.B14@232.16,70.35 232.16,69.06 ; J18.B14@262.64,70.35 262.64,69.06 ; J20.B14@293.12,70.35 293.12,69.06 ; J26.B14@323.6,70.35 323.6,69.06 ; J24.B14@354.08,70.35 354.08,69.06 ; J22.B14@384.56,70.35 383.27,69.06 354.08,69.06 ; 171.2,69.06 201.48,69.06 ; 201.48,69.06 232.16,69.06 ; 232.16,69.06 262.64,69.06 ; 262.64,69.06 293.12,69.06 ; 293.12,69.06 323.6,69.06 ; 323.6,69.06 354.08,69.06
BP_GPIO_14: J3.B15 J6.B15 J8.B15 J10.B15 J18.B15 J20.B15 J22.B15 J24.B15 J26.B15 | length 268.9
  Top Layer w0.5: J3.B15@125.48,67.81 126.73,69.06 171.2,69.06 ; J6.B15@171.2,67.81 171.2,69.06 ; J8.B15@201.48,67.81 201.48,69.06 ; J10.B15@232.16,67.81 232.16,69.06 ; J18.B15@262.64,67.81 262.64,69.06 ; J20.B15@293.12,67.81 293.12,69.06 ; J26.B15@323.6,67.81 323.6,69.06 ; J24.B15@354.08,67.81 354.08,69.06 ; J22.B15@384.56,67.81 383.31,69.06 354.08,69.06 ; 171.2,69.06 201.48,69.06 ; 201.48,69.06 232.16,69.06 ; 232.16,69.06 262.64,69.06 ; 262.64,69.06 293.12,69.06 ; 293.12,69.06 323.6,69.06 ; 323.6,69.06 354.08,69.06
BP_GPIO_15: J3.B16 J6.B16 J8.B16 J10.B16 J18.B16 J20.B16 J22.B16 J24.B16 J26.B16 | length 268.9
  Signal Layer 1 w0.5: J3.B16@125.48,65.27 126.77,63.98 140.72,63.98 ; 141,63.98 171.2,63.98 ; J6.B16@171.2,65.27 171.2,63.98 ; J8.B16@201.48,65.27 201.48,63.98 ; J10.B16@232.16,65.27 232.16,63.98 ; J18.B16@262.64,65.27 262.64,63.98 ; J20.B16@293.12,65.27 293.12,63.98 ; J26.B16@323.6,65.27 323.6,63.98 ; J24.B16@354.08,65.27 354.08,63.98 ; J22.B16@384.56,65.27 383.27,63.98 354.08,63.98 ; 171.2,63.98 201.48,63.98 ; 201.48,63.98 232.16,63.98 ; 232.16,63.98 262.64,63.98 ; 262.64,63.98 293.12,63.98 ; 293.12,63.98 323.6,63.98 ; 323.6,63.98 354.08,63.98
BP_GPIO_16: J3.B17 J6.B17 J8.B17 J10.B17 J18.B17 J20.B17 J22.B17 J24.B17 J26.B17 | length 268.9
  Signal Layer 1 w0.5: J3.B17@125.48,62.73 126.77,61.44 140.72,61.44 ; 141,61.44 171.2,61.44 ; J6.B17@171.2,62.73 171.2,61.44 ; J8.B17@201.48,62.73 201.48,61.44 ; J10.B17@232.16,62.73 232.16,61.44 ; J18.B17@262.64,62.73 262.64,61.44 ; J20.B17@293.12,62.73 293.12,61.44 ; J26.B17@323.6,62.73 323.6,61.44 ; J24.B17@354.08,62.73 354.08,61.44 ; J22.B17@384.56,62.73 383.27,61.44 354.08,61.44 ; 171.2,61.44 201.48,61.44 ; 201.48,61.44 232.16,61.44 ; 232.16,61.44 262.64,61.44 ; 262.64,61.44 293.12,61.44 ; 293.12,61.44 323.6,61.44 ; 323.6,61.44 354.08,61.44
BP_GPIO_17: J3.B19 J6.B19 J8.B19 J10.B19 J18.B19 J20.B19 J22.B19 J24.B19 J26.B19 | length 269.2
  Bottom Layer w0.5: J3.B19@125.48,57.65 126.77,56.36 171.2,56.36 ; J6.B19@171.2,57.65 171.2,56.36 ; J8.B19@201.48,57.65 201.48,56.36 ; J10.B19@232.16,57.65 232.16,56.36 ; J18.B19@262.64,57.65 262.64,56.36 ; J20.B19@293.12,57.65 293.12,56.36 ; J26.B19@323.6,57.65 323.6,56.36 ; J24.B19@354.08,57.65 354.08,56.36 ; J22.B19@384.56,57.65 383.27,56.36 354.08,56.36 ; 171.2,56.36 201.48,56.36 ; 201.48,56.36 232.16,56.36 ; 232.16,56.36 262.64,56.36 ; 262.64,56.36 293.12,56.36 ; 293.12,56.36 323.6,56.36 ; 323.6,56.36 354.08,56.36
BP_GPIO_18: J3.B20 J6.B20 J8.B20 J10.B20 J18.B20 J20.B20 J22.B20 J24.B20 J26.B20 | length 268.9
  Top Layer w0.5: J3.B20@125.48,55.11 126.73,56.36 171.2,56.36 ; J6.B20@171.2,55.11 171.2,56.36 ; J8.B20@201.48,55.11 201.48,56.36 ; J10.B20@232.16,55.11 232.16,56.36 ; J18.B20@262.64,55.11 262.64,56.36 ; J20.B20@293.12,55.11 293.12,56.36 ; J26.B20@323.6,55.11 323.6,56.36 ; J24.B20@354.08,55.11 354.08,56.36 ; J22.B20@384.56,55.11 383.31,56.36 354.08,56.36 ; 171.2,56.36 201.48,56.36 ; 201.48,56.36 232.16,56.36 ; 232.16,56.36 262.64,56.36 ; 262.64,56.36 293.12,56.36 ; 293.12,56.36 323.6,56.36 ; 323.6,56.36 354.08,56.36
BP_GPIO_19: J3.B21 J6.B21 J8.B21 J10.B21 J18.B21 J20.B21 J22.B21 J24.B21 J26.B21 | length 268.9
  Signal Layer 1 w0.5: J3.B21@125.48,52.57 126.77,51.28 140.72,51.28 ; 141,51.28 171.2,51.28 ; J6.B21@171.2,52.57 171.2,51.28 ; J8.B21@201.48,52.57 201.48,51.28 ; J10.B21@232.16,52.57 232.16,51.28 ; J18.B21@262.64,52.57 262.64,51.28 ; J20.B21@293.12,52.57 293.12,51.28 ; J26.B21@323.6,52.57 323.6,51.28 ; J24.B21@354.08,52.57 354.08,51.28 ; J22.B21@384.56,52.57 383.27,51.28 354.08,51.28 ; 171.2,51.28 201.48,51.28 ; 201.48,51.28 232.16,51.28 ; 232.16,51.28 262.64,51.28 ; 262.64,51.28 293.12,51.28 ; 293.12,51.28 323.6,51.28 ; 323.6,51.28 354.08,51.28
BP_GPIO_20: J3.B22 J6.B22 J8.B22 J10.B22 J18.B22 J20.B22 J22.B22 J24.B22 J26.B22 | length 268.9
  Signal Layer 1 w0.5: J3.B22@125.48,50.03 126.77,48.74 140.72,48.74 ; 141,48.74 171.2,48.74 ; J6.B22@171.2,50.03 171.2,48.74 ; J8.B22@201.48,50.03 201.48,48.74 ; J10.B22@232.16,50.03 232.16,48.74 ; J18.B22@262.64,50.03 262.64,48.74 ; J20.B22@293.12,50.03 293.12,48.74 ; J26.B22@323.6,50.03 323.6,48.74 ; J24.B22@354.08,50.03 354.08,48.74 ; J22.B22@384.56,50.03 383.27,48.74 354.08,48.74 ; 171.2,48.74 201.48,48.74 ; 201.48,48.74 232.16,48.74 ; 232.16,48.74 262.64,48.74 ; 262.64,48.74 293.12,48.74 ; 293.12,48.74 323.6,48.74 ; 323.6,48.74 354.08,48.74
BP_GPIO_21: J3.B24 J6.B24 J8.B24 J10.B24 J18.B24 J20.B24 J22.B24 J24.B24 J26.B24 | length 269.2
  Bottom Layer w0.5: J3.B24@125.48,44.95 126.77,43.66 171.2,43.66 ; J6.B24@171.2,44.95 171.2,43.66 ; J8.B24@201.48,44.95 201.48,43.66 ; J10.B24@232.16,44.95 232.16,43.66 ; J18.B24@262.64,44.95 262.64,43.66 ; J20.B24@293.12,44.95 293.12,43.66 ; J26.B24@323.6,44.95 323.6,43.66 ; J24.B24@354.08,44.95 354.08,43.66 ; J22.B24@384.56,44.95 383.27,43.66 354.08,43.66 ; 171.2,43.66 201.48,43.66 ; 201.48,43.66 232.16,43.66 ; 232.16,43.66 262.64,43.66 ; 262.64,43.66 293.12,43.66 ; 293.12,43.66 323.6,43.66 ; 323.6,43.66 354.08,43.66
BP_GPIO_22: J3.B25 J6.B25 J8.B25 J10.B25 J18.B25 J20.B25 J22.B25 J24.B25 J26.B25 | length 268.9
  Top Layer w0.5: J3.B25@125.48,42.41 126.73,43.66 171.2,43.66 ; J6.B25@171.2,42.41 171.2,43.66 ; J8.B25@201.48,42.41 201.48,43.66 ; J10.B25@232.16,42.41 232.16,43.66 ; J18.B25@262.64,42.41 262.64,43.66 ; J20.B25@293.12,42.41 293.12,43.66 ; J26.B25@323.6,42.41 323.6,43.66 ; J24.B25@354.08,42.41 354.08,43.66 ; J22.B25@384.56,42.41 383.31,43.66 354.08,43.66 ; 171.2,43.66 201.48,43.66 ; 201.48,43.66 232.16,43.66 ; 232.16,43.66 262.64,43.66 ; 262.64,43.66 293.12,43.66 ; 293.12,43.66 323.6,43.66 ; 323.6,43.66 354.08,43.66